# Altium PCB ir.PCBDOC
Units mil, origin at the board's own origin, x right, y up, seen from the top; angles counter-clockwise.
Board outline 1900 x 1250 mil, 2 copper layers (Top Layer, Bottom Layer); 21 components, 16 nets, 63 pads, 0 vias.
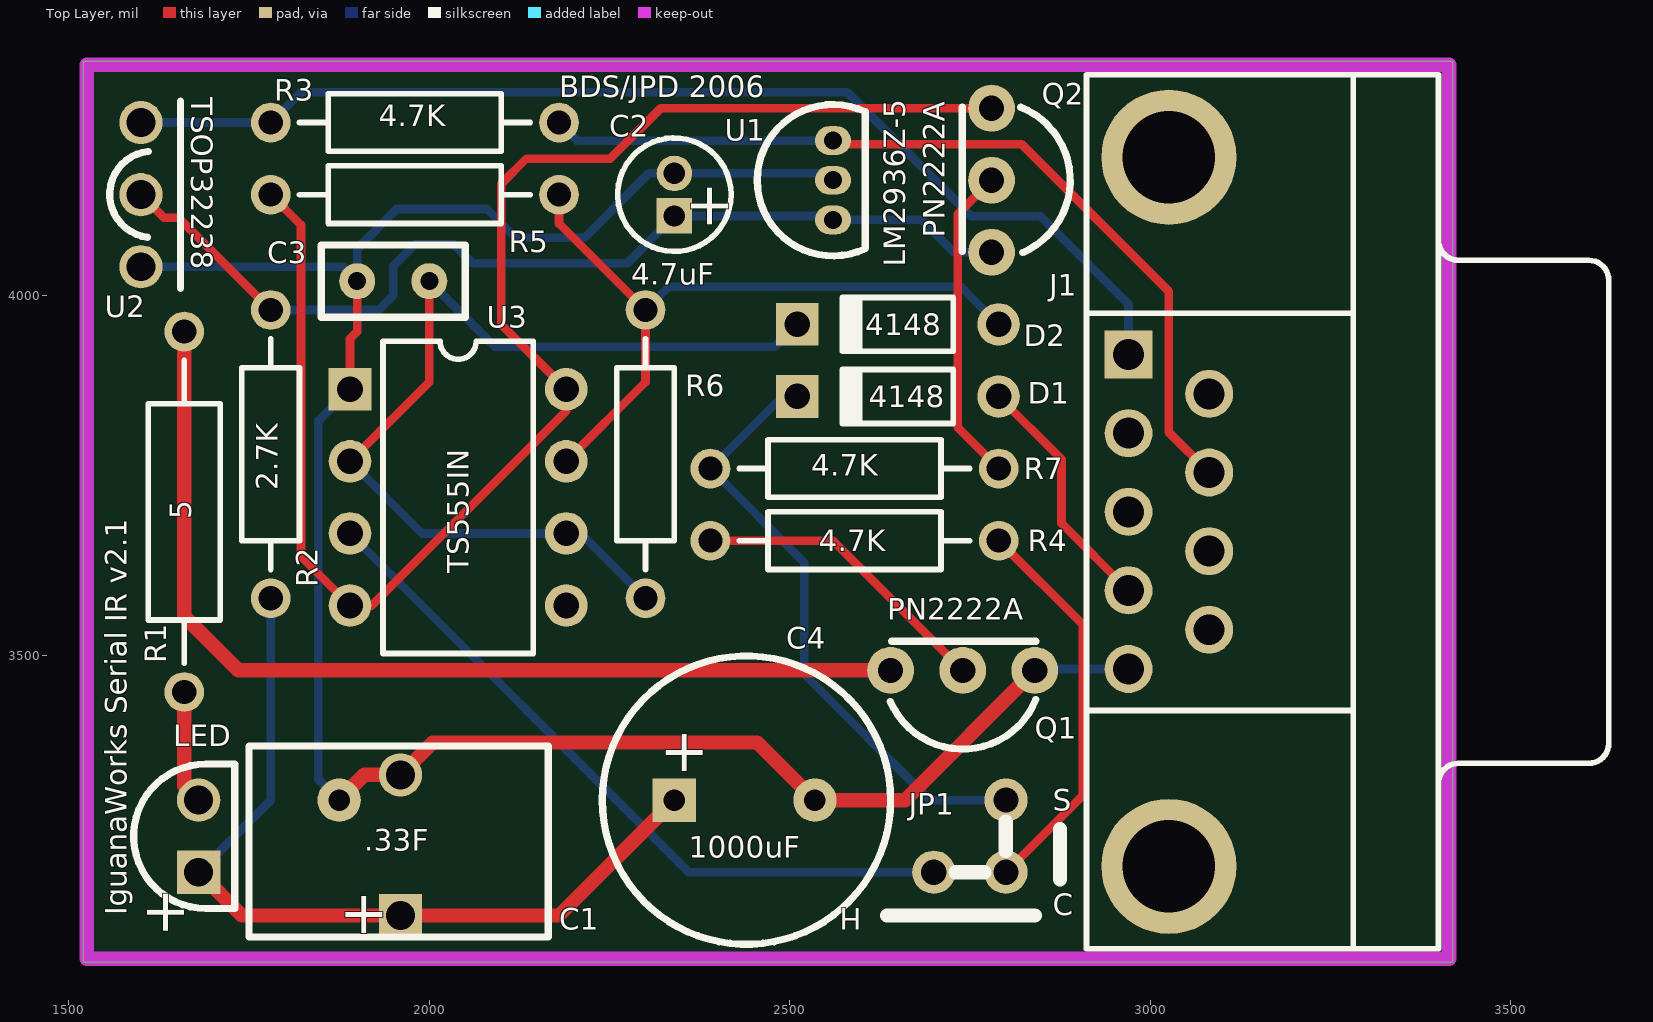
[diagram p0: Top Layer view]
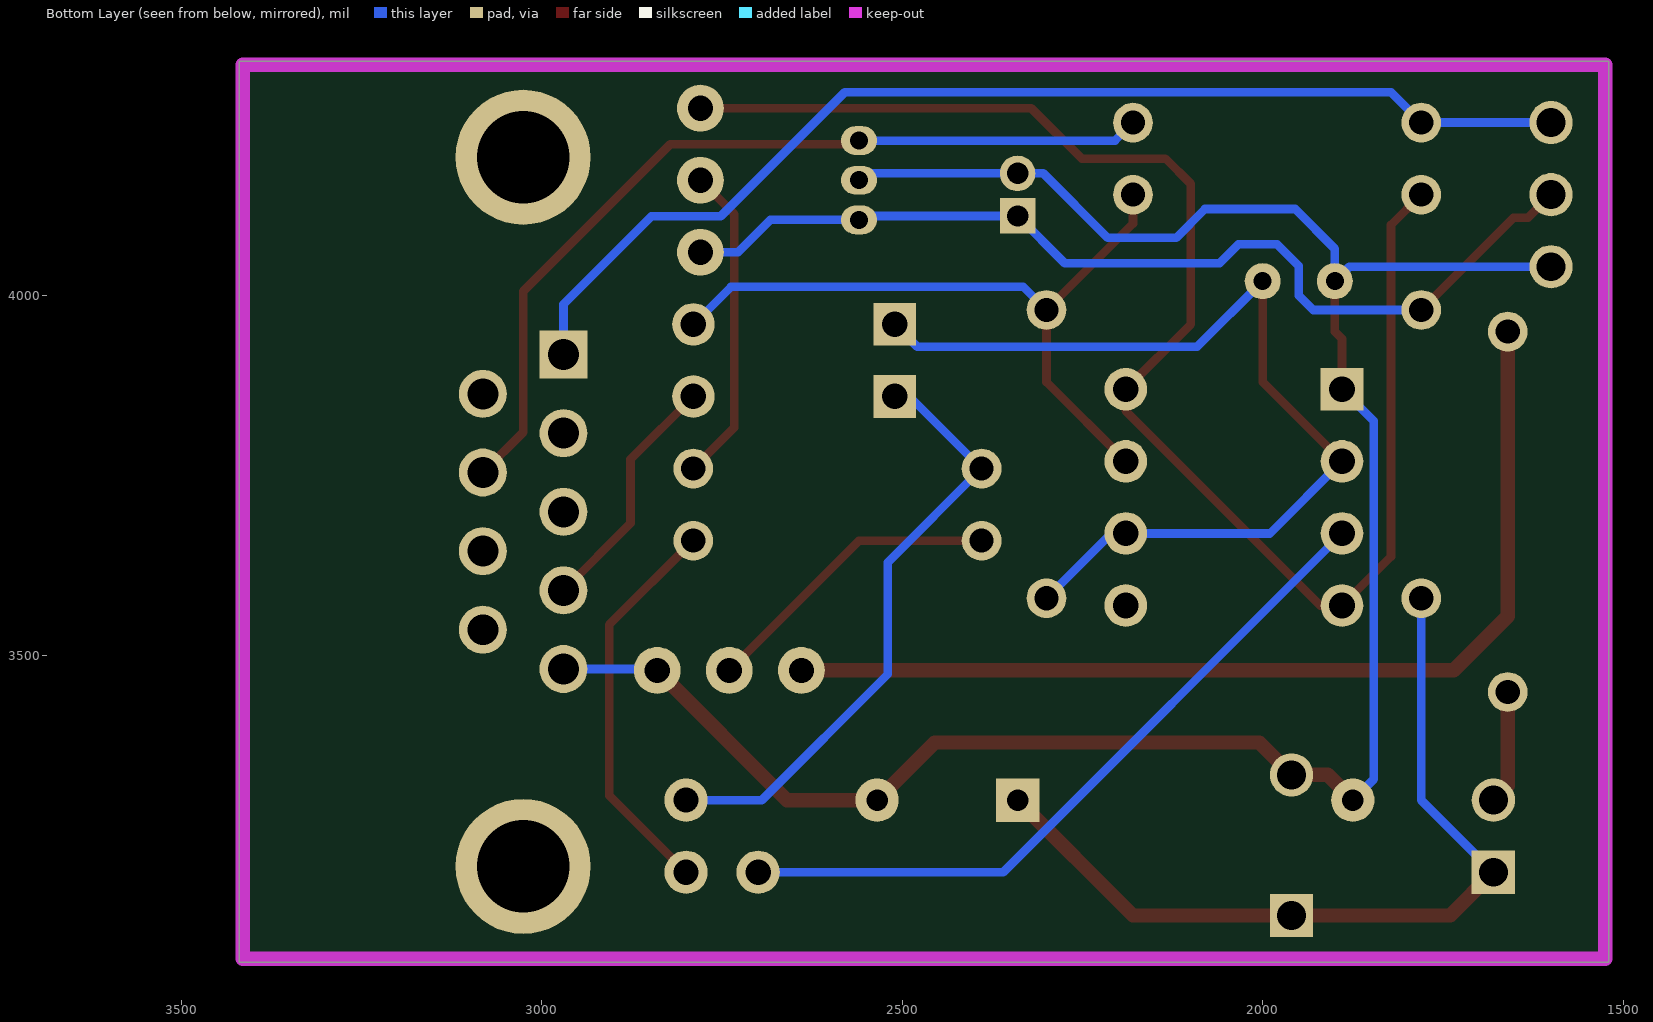
[diagram p1: Bottom Layer view, seen from below]

## Layer stack, top to bottom
Top Layer: signal copper 1.4
Dielectric: dielectric 12.6, FR-4, Dk 4.8
Bottom Layer: signal copper 1.4

## Board outline
1520,3075 3420,3075 3420,4325 1520,4325

## Design rules (kind name [scope] priority, off if disabled: settings)
Clearance [All] p1: gap=8
ComponentClearance [All] p1: gap=10 collisioncheckmode=2 verticalgap=10
HoleSize [All] p1: absolutevalues=TRUE maxlimit=150 minlimit=1 maxpercent=80.000 minpercent=20.000
PolygonConnect [All] p1: connectstyle=Relief reliefconductorwidth=10 reliefentries=4 polygonreliefangle="90 Angle"
RoomDefinition ir [InComponentClass('ir')] p1 off: confinementstyle=ConfineIn formatcopy=TRUE lockcomponents=FALSE outline 3400,3000 6815,3000 6815,4340 3400,4340
RoutingVias [All] p1: holewidth=25 width=50 viastyle="Through Hole" minholewidth=25 minwidth=50 maxholewidth=25 maxwidth=50
SolderMaskExpansion [All] p1: expansion=4
TestPointUsage [All] p1: valid=0 allowmultiple=FALSE
Testpoint [All] p1: side=15 testpointundercomponent=TRUE minsize=40 maxsize=100 preferedsize=60 minholesize=0 maxholesize=40 preferedholesize=32 testpointgrid=1 style=1023 order=0-112345678
Width [All] p1: maxlimit=50 minlimit=12 preferedwidth=12
16 further rules are at their usual default settings.

## Components (designator, comment, footprint, x,y, rotation, side; value= is the part's Value field where it differs from the comment)
C1 "0.33F" SuperCapacitor 1960,3140 r0 top
C2 "Cap Pol1" CAPPR1.5-4x5 2340,4140 r90 top
C3 "Cap" Axial-0.1 1900,4020 r0 top
C4 "1000uF" "Cap 10mm (5mm lead space)" 2340,3300 r0 top
D1 "1N4148" DIO7.1-3.9x1.9 2650,3860 r180 top
D2 "1N4148" DIO7.1-3.9x1.9 2650,3960 r180 top
J1 "D Connector 9" DSUB1.385-2H9 3400,3700 r270 top
JP1 "Select jumper" "Select Jumper" 2800,3200 r90 top
LED "TSAL 6400" LED 1680,3200 r90 top
Q1 "NPN" TO-92 2840,3480 r180 top
Q2 "NPN" TO-92 2780,4260 r270 top
R1 "3-10 Ohm" AXIAL-0.5 1660,3700 r270 top
R2 "2.7K" AXIAL-0.4 1780,3780 r90 top
R3 "4.7K" AXIAL-0.4 1980,4240 r180 top
R4 "Res2" AXIAL-0.4 2590,3660 r180 top
R5 "Res2" AXIAL-0.4 1980,4140 r180 top
R6 "Res2" AXIAL-0.4 2300,3780 r90 top
R7 "Res2" AXIAL-0.4 2590,3760 r0 top
U1 "LM2936Z-5.0" "TO-92 straight" 2560,4060 r90 top
U2 "TSOP2238" vishay1 1600,4240 r180 top
U3 "TS555IN" DIP8 2040,3720 r270 top

## Footprints (in the part's own frame and the unit in brackets; to place one, negate y for a bottom-side part, rotate by r counter-clockwise, add the part's x,y. Pads: shape width x height; smd on the part's side, far side on the other; paste and mask are expansions set on the pad)
Axial-0.1 [mil] "0.1\" spaced, 2 lead part"
  round 50 hole 25: 1(0,0) 2(100,0)
  silkscreen extent -50,-50 150,50
AXIAL-0.4 [mm] "Resistor; 2 Leads"
  round 1.4 hole 0.85: 1(-5.08,0) 2(5.08,0)
  silkscreen extent -4.06,-1.02 4.06,1.02
AXIAL-0.5 [mm] "Semiconductor Resistor; 2 Leads"
  round 1.4 hole 0.85: 1(-6.35,0) 2(6.35,0)
  silkscreen extent -5.33,-1.27 5.33,1.27
"Cap 10mm (5mm lead space)" [mil] "Radial capacitor, 10mm case diameter, 5mm lead spacing"
  rect 60x60 hole 30: 1(0,0)
  round 60 hole 30: 2(195,0)
  silkscreen extent -100,-200 300,200
CAPPR1.5-4x5 [mm] "Capacitor, Electrolytic, Radial; Body 4 x 5 mm (Dia.xH typ); Pin Spacing 1.5 mm (typ)"
  rect 1.25x1.25 hole 0.75: 1(-0.75,0)
  round 1.25 hole 0.75: 2(0.75,0)
  silkscreen extent -2,-2 2,2
DIO7.1-3.9x1.9 [mm] "Diode, Axial; Body 3.8 x 1.9 mm (LxDia. max), Lead Dia. 0.53 mm (max)"
  round 1.5 hole 0.9: 1(-3.55,0)
  rect 1.5x1.5 hole 0.9: 2(3.55,0)
  silkscreen extent -1.95,-0.95 2.05,0.95
DIP8 [mm] "DIP; 8 Leads; Row Spacing 7.62 mm; Pitch 2.54 mm"
  rect 1.5x1.5 hole 0.9: 1(-3.81,-3.81)
  round 1.5 hole 0.9: 2(-1.27,-3.81) 3(1.27,-3.81) 4(3.81,-3.81) 5(3.81,3.81) 6(1.27,3.81) 7(-1.27,3.81) 8(-3.81,3.81)
  silkscreen extent -5.5,-2.65 5.5,2.65
DSUB1.385-2H9 [mm] "Connector; D Subminiature; 9 Position; Right Angle; Pitch 1.385 mm"
  rect 1.69x1.69 hole 1.09: 1(-5.54,-10.92)
  round 1.69 hole 1.09: 2(-2.77,-10.92) 3(0,-10.92) 4(2.77,-10.92) 5(5.54,-10.92) 6(-4.155,-8.08) 7(-1.385,-8.08) 8(1.385,-8.08) 9(4.155,-8.08)
  round 4.76 hole 3.26: 10(-12.495,-9.5) 11(12.495,-9.5)
  silkscreen extent -15.4,-12.4 15.4,6
LED [mil] "2-pin LED footprint"
  rect 60x60 hole 40: 1(0,0)
  round 60 hole 40: 2(100,0)
  silkscreen extent -50,-50 150,90
"Select Jumper" [mil] "3-pin jumper switch"
  round 60 hole 35: 1(100,0) 2(0,0) 3(0,100)
SuperCapacitor [mil] "double layer electric cap"
  rect 60x60 hole 40: 1(0,0)
  round 60 hole 40: 2(0,195)
  silkscreen extent -210,-30 205,235
TO-92 [mil] "standard transistor package, spread leads"
  round 65 hole 35: 1(200,0) 2(100,0) 3(0,0)
  silkscreen extent -1,-41 200,109
"TO-92 straight" [mil] "standard transistor package, straight leads"
  oval 40x50 hole 25: 1(155,0) 2(100,0) 3(45,0)
  silkscreen extent -5,-45 205,105
vishay1 [mil] "small IR receiver"
  round 60 hole 40: 1(0,0) 2(0,100) 3(0,200)
  silkscreen extent -55,-30 43,230

## Part data
C1 C4: library part "Cap Pol1", "Polarized Capacitor (Radial)"
C2: "Polarized Capacitor (Radial)"
C3: "Capacitor"
D1 D2: library part "Diode 1N4148", "High Conductance Fast Diode"
J1: "Receptacle Assembly, 9 Position, Right Angle"
JP1: "Jumper switch: 1 common, 2 poles"
LED: library part LED0, "Typical INFRARED GaAs LED"
Q1 Q2: "NPN Bipolar Transistor"
R1 R2 R3: library part Res2, "Resistor"
R4 R5 R6 R7: "Resistor"
U1: library part "Volt Reg", "Voltage Regulator"
U2: library part "TSOP2238 IR RECEIVER MODULE"
U3: "Low-Power Single CMOS Timer"

## Free pads (board coordinates)
  round 60 hole 30: 5(1875,3300)

## Nets (pads, with @x,y where several pads share a name; then routed paths per layer and width w, separated by ;. In a path a pad name is that pad's centre, name@x,y a point inside that pad or via, vN(x,y) a via of type N, cw(c..) or ccw(c..) an arc to the next point about the centre after c; other vN are vias at no path point)
DCD: J1.1 R3.2 U2.1 | length 1579.1
  Bottom Layer w12: U2.1 R3.2 1822,4282 2580,4282 2752,4110 2848,4110 2970.08,3987.92 J1.1
DTR: D1.1 J1.4 | length 343.7
  Top Layer w12: D1.1 2877,3772.76 2877,3684.02 J1.4
GND: C1.2 C2.2 C3.1 C4.2 J1.5 pad.5 Q1.3 U1.2 U2.3 U3.1 | length 3084.7
  Top Layer w12: U3.1 1890,3940 1900,3950 C3.1
  Top Layer w20: pad.5 1910,3335 C1.2 2005,3380 2455,3380 C4.2 2660,3300 Q1.3
  Bottom Layer w12: U2.3 1880,4040 C3.1 1900,4065 1955,4120 2080,4120 2120,4080 2215,4080 2304.53,4169.53 2550.47,4169.53 U1.2 ; pad.5 1846,3329 1846,3826 U3.1 ; Q1.3 2841.89,3481.89 J1.5
NetC1_1: C1.1 C4.1 LED.1 R2.1 | length 1172.5
  Top Layer w20: LED.1 1740,3140 C1.1 2180,3140 C4.1
  Bottom Layer w12: LED.1 1780,3300 R2.1
NetC2_1: C2.1 Q2.1 R2.2 U1.3 U2.2 | length 1366.8
  Top Layer w12: U2.2 1632,4108 1652,4108 R2.2
  Bottom Layer w12: R2.2 1930,3980 1950,4000 1950,4041 1980,4071 2034,4071 2060,4045 2274.53,4045 C2.1 2554.53,4110.47 U1.3 2683,4105 2728,4060 Q2.1
NetC3_2: C3.2 D2.2 R6.1 U3.2 U3.6 | length 1345
  Top Layer w12: U3.2 2000,3880 C3.2
  Bottom Layer w12: U3.2 1990,3670 2210,3670 R6.1 ; C3.2 2091,3929 2479.24,3929 D2.2
NetD1_2: D1.2 JP1.1 R7.1 | length 853
  Bottom Layer w12: D1.2 2490,3860 R7.1 2520,3630 2520,3475 2695,3300 JP1.1
NetD2_1: D2.1 R5.1 R6.2 U3.7 | length 989.8
  Top Layer w12: R5.1 2180,4100 R6.2 2300,3880 U3.7
  Bottom Layer w12: R6.2 2332,4012 2737.76,4012 D2.1
NetJP1_2: JP1.2 R4.1 | length 552.4
  Top Layer w12: R4.1 2906.5,3543.5 2906.5,3306.5 JP1.2
NetJP1_3: JP1.3 U3.3 | length 1004.7
  Bottom Layer w12: U3.3 2360,3200 JP1.3
NetLED_2: LED.2 R1.2 | length 158.3
  Top Layer w20: R1.2 1660,3320 LED.2
NetQ1_1: Q1.1 R1.1 | length 1406.1
  Top Layer w20: R1.1 1660,3555 1735,3480 Q1.1
NetQ1_2: Q1.2 R4.2 | length 424.6
  Top Layer w12: R4.2 2560,3660 Q1.2
NetQ2_2: Q2.2 R7.2 | length 443.1
  Top Layer w12: Q2.2 2733,4113 2733,3817 R7.2
NetQ2_3: Q2.3 R5.2 U3.4 U3.8 | length 2103.2
  Top Layer w12: R5.2 1822,4098 1822,3638 U3.4 1920,3570 2190,3840 U3.8 2100,3960 2100,4155 2135,4190 2251,4190 2321,4260 Q2.3
RTS: J1.7 R3.1 U1.1 | length 1217.5
  Top Layer w12: U1.1 2565,4210 2822,4210 3026,4006 3026,3810.42 J1.7
  Bottom Layer w12: R3.1 2205,4215 U1.1
pads on no net: J1.2 J1.3 J1.6 J1.8 J1.9 J1.10 J1.11 U3.5

## Keep-outs
Keep-Out Layer:
  lines w20: 1525,3080 1525,4320 1535,4320 3415,4320 3415,3080 1525,3080

## Silkscreen, mask and mechanical layers (free items; w line width, h text height)
Top Overlay:
  lines w20: 2635,3140 2840,3140 ; 2730,3200 2770,3200 ; 2800,3230 2800,3270 ; 2875,3190 2875,3260
  text "TSOP32238" at 1670,4275 h30 r270
  text "BDS/JPD 2006" at 2180,4275 h30
  text "4.7K" at 1930,4235 h30
  text "PN2222A" at 2715,4080 h30 r90
  text "LM2936Z-5" at 2660,4040 h30 r90
  text "4.7uF" at 2280,4015 h30
  text "4148" at 2605,3945 h30
  text "4148" at 2610,3845 h30
  text "4.7K" at 2530,3750 h30
  text "2.7K" at 1790,3730 h30 r90
  text "5" at 1670,3690 h30 r90
  text "4.7K" at 2540,3645 h30
  text "TS555IN" at 2055,3615 h30 r90
  text "PN2222A" at 2635,3550 h30
  text "S" at 2865,3285 h30
  text ".33F" at 1910,3230 h30
  text "1000uF" at 2360,3220 h30
  text "H" at 2600,3150 h30 r180
  text "IguanaWorks Serial IR v2.1" at 1580,3140 h30 r90
  text "C" at 2865,3140 h30
  text "+" at 1875,3115 h60
  text "+" at 1660,3110 h60 r90

## Text inside footprints (layer, text, board x,y; h text height)
C2: Top Overlay "+" at 2415,4090 h59.06 r90
C4: Top Overlay "+" at 2320,3340 h60